# Altium PCB Dyn_MicPCB.PcbDoc
Units mil, origin at the board's own origin, x right, y up, seen from the top; angles counter-clockwise.
Board outline 1575 x 800 mil, 2 copper layers (Top Layer, Bottom Layer); 18 components, 11 nets, 44 pads, 0 vias.
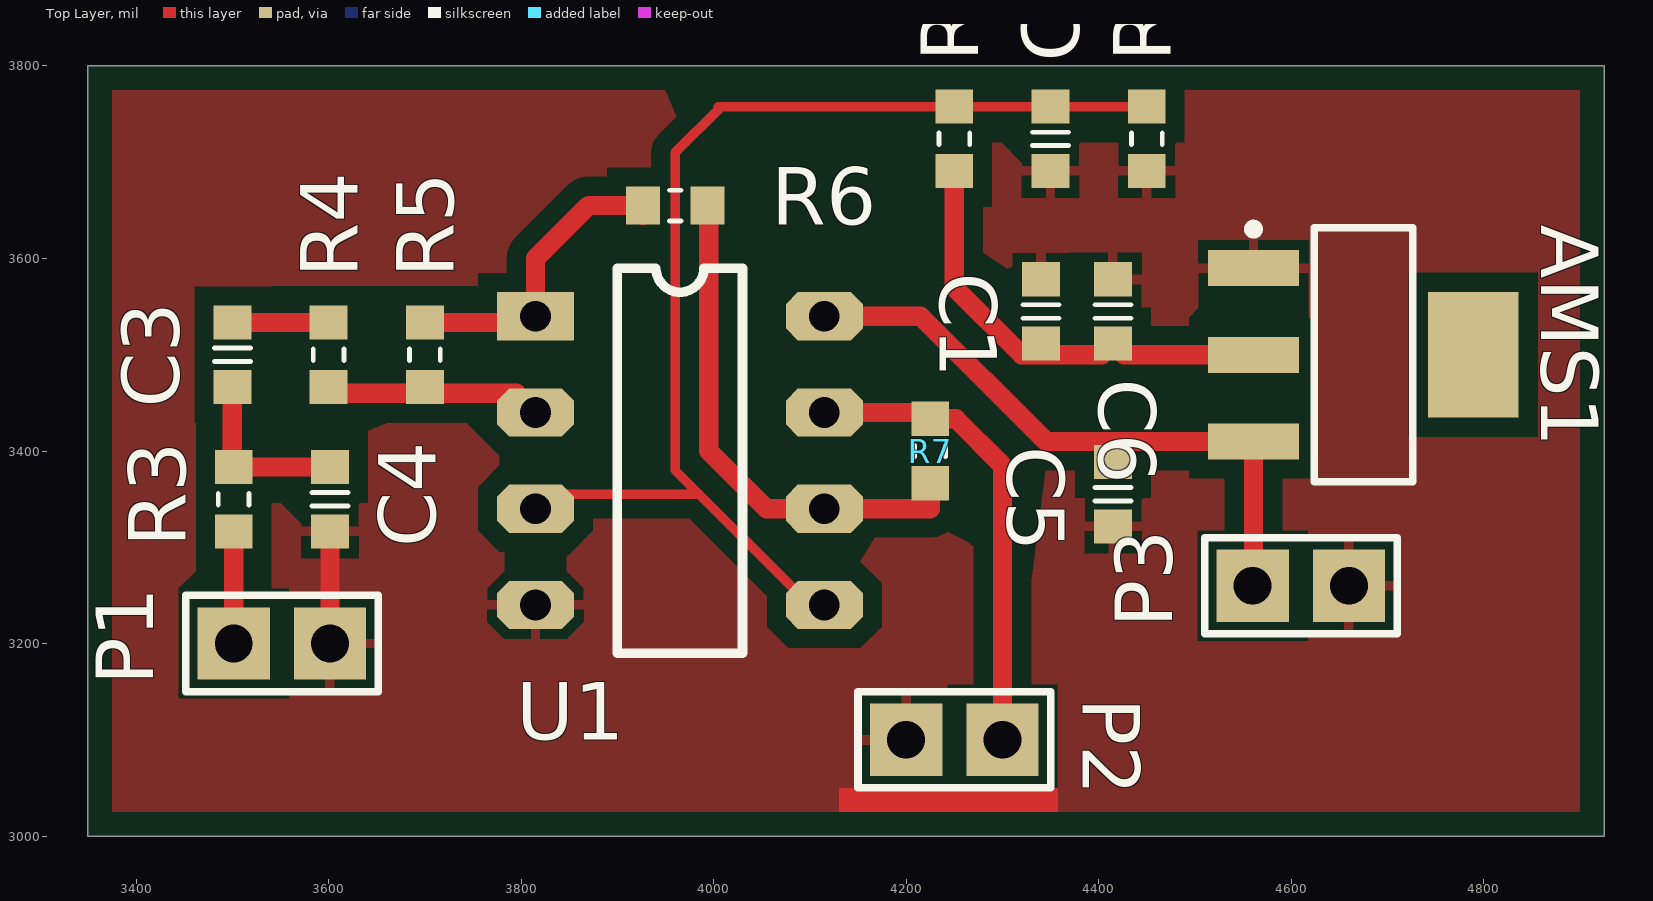
[diagram p0: Top Layer view]
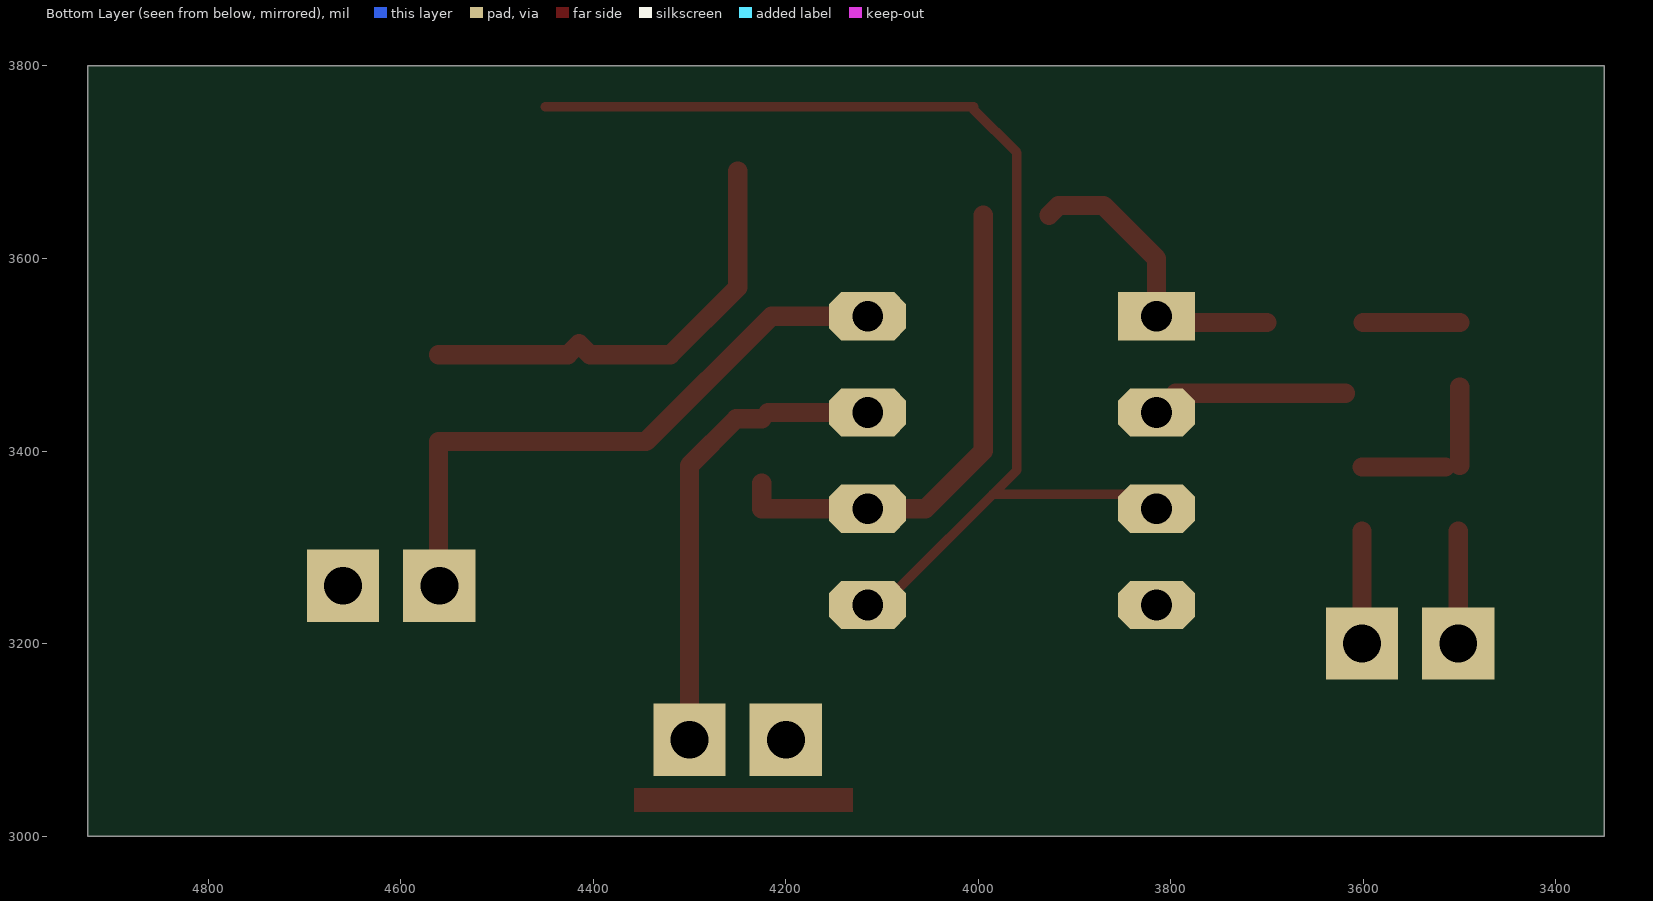
[diagram p1: Bottom Layer view, seen from below]

## Layer stack, top to bottom
Top Layer: signal copper 1.4
Dielectric: dielectric 12.6, FR-4, Dk 4.8
Bottom Layer: signal copper 1.4

## Board outline
3350,3800 3350,3000 4925,3000 4925,3800

## Design rules (kind name [scope] priority, off if disabled: settings)
Clearance [All] p1: gap=10
PolygonConnect [All] p1: connectstyle=Relief reliefconductorwidth=10 reliefentries=4 polygonreliefangle="90 Angle" airgapwidth=10
RoutingVias [All] p1: holewidth=28 width=50 viastyle="Through Hole" minholewidth=28 minwidth=50 maxholewidth=28 maxwidth=50
SolderMaskExpansion [All] p1: expansion=4
Width [All] p1: maxlimit=30 minlimit=10 preferedwidth=10 minimp=50.000000 maximp=50.000000 favimp=50.000000
28 further rules are at their usual default settings.

## Components (designator, comment, footprint, x,y, rotation, side; value= is the part's Value field where it differs from the comment)
AMS1 "AMS1117-3.3" SOT223 4675,3500 r0 top
C1 "Cap_0603" CAP_0603 4340,3545 r270 top
C2 "Cap_0603" CAP_0603 4350,3724.25 r90 top
C3 "Cap_0603" CAP_0603 3500,3500 r270 top
C4 "Cap_0603" CAP_0603 3601.38,3350 r90 top
C5 "Cap_0603" CAP_0603 4415,3355 r90 top
C6 "Cap_0603" CAP_0603 4415,3545 r270 top
P1 "Signal In" HDR1X2_180_2.54 3601.38,3200 r180 top
P2 "Signal Out" HDR1X2_180_2.54 4200,3100 r0 top
P3 "Power" HDR1X2_180_2.54 4660,3260 r180 top
R1 "Res_0603" RES_0603 4250,3724.25 r270 top
R2 "Res_0603" RES_0603 4450,3724.25 r90 top
R3 "Res_0603" RES_0603 3501.38,3350 r270 top
R4 "Res_0603" RES_0603 3600,3500 r90 top
R5 "Res_0603" RES_0603 3700,3500 r270 top
R6 "Res_0603" RES_0603 3960,3655 r0 top
R7 "Res_0603" RES_0603 4225,3400 r90 top
U1 "OPA2132" DIP_8 3815,3540 r0 top

## Footprints (in the part's own frame and the unit in brackets; to place one, negate y for a bottom-side part, rotate by r counter-clockwise, add the part's x,y. Pads: shape width x height; smd on the part's side, far side on the other; paste and mask are expansions set on the pad)
CAP_0603 [mm] "Chip Capacitor, Body 1.6x0.8mm, 0603, IPC Medium Density"
  rect 0.9x1 smd: 1(-0.85,0) 2(0.85,0)
  Top Layer pour cut-out: -0.4,0.6 0.4,0.6 0.4,-0.6 -0.4,-0.6
  silkscreen extent -0.18,-0.48 0.18,0.48, body extent -0.85,-0.45 0.85,0.45, height 0.89
DIP_8 [mil]
  rect 80x50 hole 32: 1(0,0)
  oct 80x50 hole 32: 2(0,-100) 3(0,-200) 4(0,-300) 5(300,-300) 6(300,-200) 7(300,-100) 8(300,0)
  silkscreen extent 85,-350 215,50, body extent -5,-350 305,50, height 210
HDR1X2_180_2.54 [mm] "Connector; Header; 2 Position"
  rect 1.905x1.905 hole 1: 1(0,0) 2(2.54,0)
  silkscreen extent -1.27,-1.27 3.81,1.27, body extent -1.27,-1.27 3.81,1.27, height 7.58
RES_0603 [mm]
  rect 0.9x1 smd: 1(-0.85,0) 2(0.85,0)
  Top Layer pour cut-out: -0.4,0.6 0.4,0.6 0.4,-0.6 -0.4,-0.6
  silkscreen extent -0.15,-0.41 0.15,0.41, body extent -0.87,-0.47 0.88,0.48, height 0.54
SOT223 [mm] "SOT223, 4-Leads, Body 6.7x7.3mm (max), Pitch 2.29mm, IPC Medium Density"
  rect 2.4x0.95 smd: 1(-2.9,2.29) 2(-2.9,0) 3(-2.9,-2.29)
  rect 2.4x3.3 smd: 4(2.9,0)
  silkscreen extent -3.02,-3.35 1.3,3.44, body extent -3.65,-3.35 3.65,3.35, height 1.8

## Part data
AMS1: library part AMS1117, "Power"
C1 C2 C3 C4 C5 C6: "Capacitor"
P1 P2 P3: library part HDR1X2_180_2.54, "Header"
R1 R2 R3 R4 R5 R6 R7: "Resistor"
U1: "TI BB OPA2132 - 2 op amps IC"

## Nets (pads, with @x,y where several pads share a name; then routed paths per layer and width w, separated by ;. In a path a pad name is that pad's centre, name@x,y a point inside that pad or via, vN(x,y) a via of type N, cw(c..) or ccw(c..) an arc to the next point about the centre after c; other vN are vias at no path point)
"+3.3 V": AMS1.2 C1.2 C6.2 R1.2 | length 470.2
  Top Layer w20: R1.2 4250,3570 4320,3500 4403.46,3500 C6.2 4426.54,3500 AMS1.2
+5: AMS1.3 C5.2 P3.2 U1.8 | length 648.8
  Top Layer w20: U1.8 4215,3540 4345.16,3409.84 AMS1.3 P3.2@4560.83,3260.83
GND: AMS1.1 C1.1 C2.1 C4.1 C5.1 C6.1 P1.1 P2.1 P3.1 R2.1 U1.4 | length 116.5
  Top Layer w20: P1.1 C4.1
NetC3_1: C3.1 R4.2 | length 100
  Top Layer w20: C3.1 R4.2
NetC3_2: C3.2 C4.2 R3.1 | length 168.1
  Top Layer w20: R3.1@3500,3384.84 C3.2 ; R3.1@3515,3383.46 C4.2
NetR4_1: R4.1 R5.2 U1.2 | length 176.5
  Top Layer w20: R4.1@3618.46,3460 U1.2@3795,3460
NetR6_2: R6.2 R7.1 U1.6 | length 526.4
  Top Layer w20: R6.2@3995,3645 3995,3400 4055,3340 U1.6 4225,3340 R7.1
OUTA: R5.1 R6.1 U1.1 | length 306.9
  Top Layer w20: R5.1 U1.1@3808.46,3533.46 ; U1.1 3815,3600 3870,3655 3916.54,3655 R6.1@3926.54,3645
OUTB: P2.2 R7.2 U1.7 | length 468.5
  Top Layer w20: U1.7 R7.2@4218.46,3440 ; R7.2 4251.54,3433.46 4300,3385 4300,3150 P2.2@4300,3115
SIGNAL: P1.2 R3.2 | length 116.5
  Top Layer w20: P1.2 R3.2
VBIAS: C2.2 R1.1 R2.2 U1.3 U1.5 | length 1212.8
  Top Layer w10: U1.3 3830,3355 3985,3355 ; 4005,3755 3960,3710 3960,3380 U1.5@4100,3240 ; 4005,3757.72 R1.1 C2.2 R2.2
pads on no net: AMS1.4

## Polygon pours and split planes (outlines as drawn)
GND on Top Layer "Top Layer-GND" (solid, remove dead copper, pour order 4): 3375,3775 3375,3025 4900,3025 4900,3775

## Other copper
Top Layer:
  rectangle net GND: 4130,3025 4357.5,3050

## Silkscreen, mask and mechanical layers (free items; w line width, h text height)
Mechanical 1:
  lines w10: 3350,3000 3350,3800 4925,3800 4925,3725 4925,3000 3350,3000